# Altium PCB CH32F&V208G-R0.PcbDoc
Units mil, origin at the board's own origin, x right, y up, seen from the top; angles counter-clockwise.
Board outline 2362.2 x 3149.61 mil, 2 copper layers (Top Layer, Bottom Layer); 51 components, 56 nets, 217 pads, 902 vias.
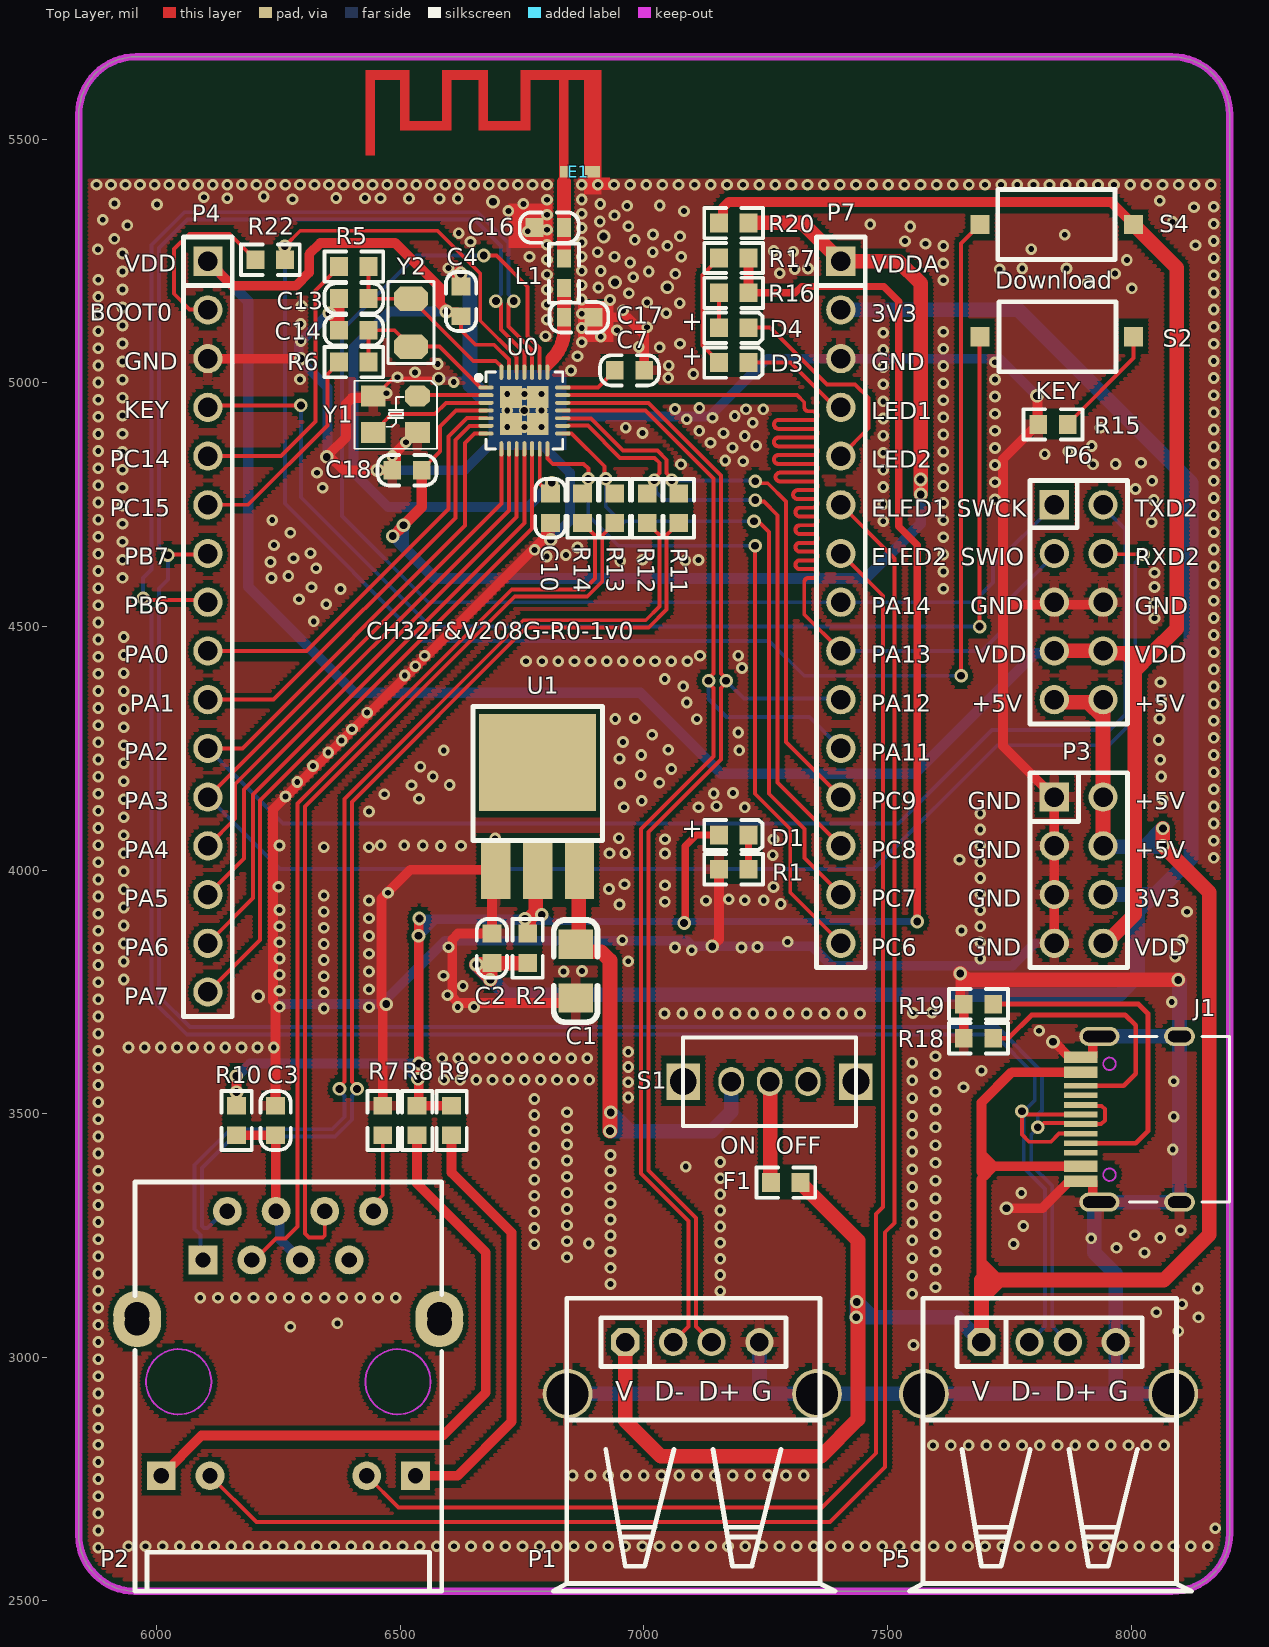
[diagram p0: Top Layer view]
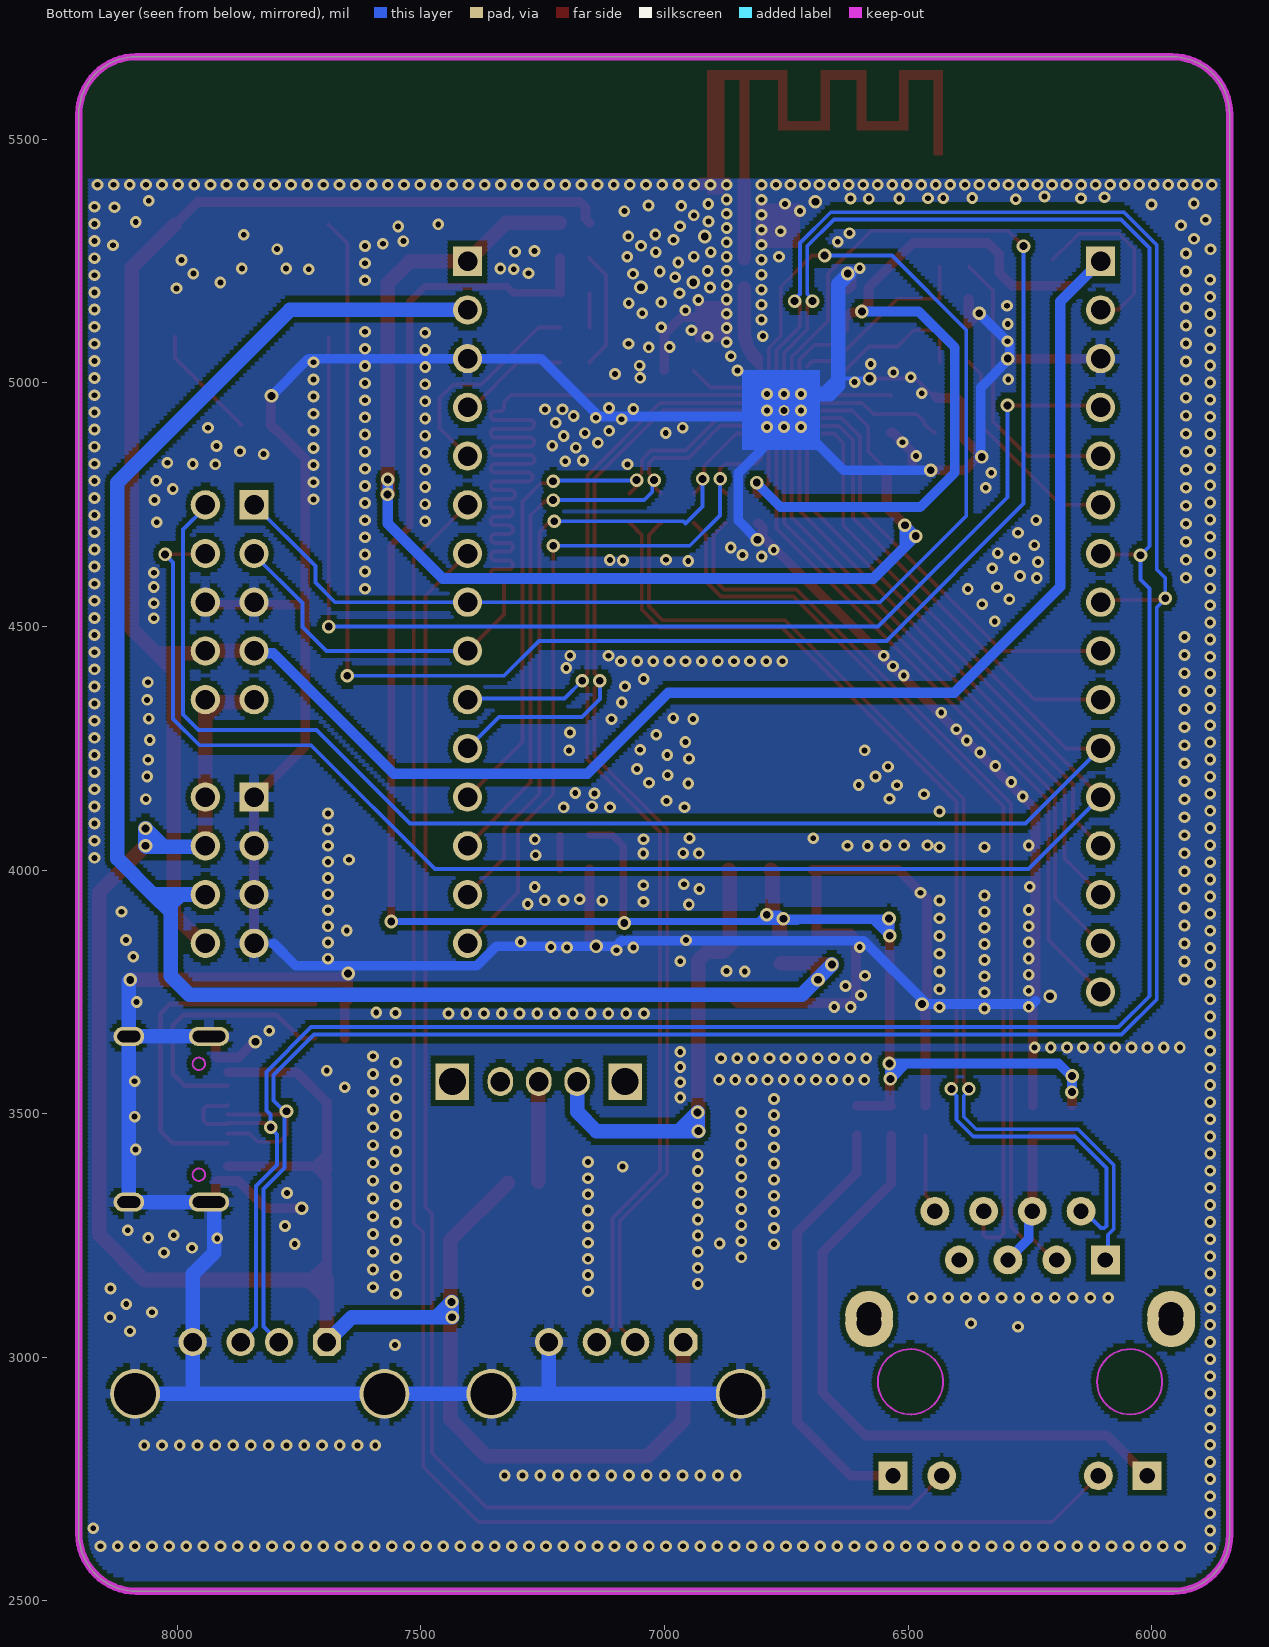
[diagram p1: Bottom Layer view, seen from below]

## Layer stack, top to bottom
Top Solder: solder mask 0.4, Solder Resist, Dk 3.5
Top Layer: signal copper 1.4
Dielectric 1: dielectric 12.6, FR-4, Dk 4.8
Bottom Layer: signal copper 1.4
Bottom Solder: solder mask 0.4, Solder Resist, Dk 3.5

## Board outline
5840,2635.27 ccw(c5955.24,2635.27) 5955.24,2520.03 ccw(c5955.27,2520.03) 5955.27,2520 8084.09,2520 ccw(c8084.09,2638.11) 8202.2,2638.11 8202.2,5551.5 ccw(c8084.09,5551.5) 8084.09,5669.61 5958.11,5669.61 ccw(c5958.11,5551.5) 5840,5551.5

## Design rules (kind name [scope] priority, off if disabled: settings)
Clearance Clearance_2 [InNet('ANT') or InNet('NetC16_2') vs InPolygon] p1: gap=6 ignorepadtopadclearanceinfootprint=FALSE
Clearance Clearance_1 [InPolygon] p2: gap=10 ignorepadtopadclearanceinfootprint=FALSE
Clearance [All] p3: gap=6 ignorepadtopadclearanceinfootprint=FALSE except(8: Arc-Via Track-Via SMDPad-Via THPad-Via Via-Via Via-Fill Via-Poly Via-Region Via-Hole)
ComponentClearance [All] p1 off: gap=10 collisioncheckmode=3 verticalgap=10 showdistances=FALSE
DiffPairsRouting [All] p1: maxlimit=10 minlimit=7 mostfreqgap=8 toplayer_minwidth=6 toplayer_maxwidth=15 toplayer_prefwidth=8 bottomlayer_minwidth=6 bottomlayer_maxwidth=15 bottomlayer_prefwidth=8 maxuncoupledlength=500
MinimumSolderMaskSliver [All] p1 off: minsoldermaskwidth=10
PolygonConnect PolygonConnect_1 [IsVia] p1: connectstyle=Direct reliefconductorwidth=10 reliefentries=4 polygonreliefangle="90 Angle" airgapwidth=10
PolygonConnect [All] p2: connectstyle=Relief reliefconductorwidth=20 reliefentries=4 polygonreliefangle="90 Angle" airgapwidth=10
RoutingVias [All] p1: holewidth=16 width=28 viastyle="Through Hole" minholewidth=12 minwidth=24 maxholewidth=28 maxwidth=50
SilkToSilkClearance [All] p1 off: silktosilkclearance=10
SilkToSolderMaskClearance [IsPad] p1 off: minsilkscreentomaskgap=10 clearancetoexposedcopper=TRUE
SolderMaskExpansion [All] p1: expansion=2 istentingtop=FALSE
Width [All] p1: maxlimit=100 minlimit=6 preferedwidth=10
25 further rules are at their usual default settings.

## Classes and differential pairs
differential pair NewDifferentialPair4: +PA11 -PA12
differential pair NewDifferentialPair3: +PC6 -PC7
differential pair NewDifferentialPair2: +PC8 -PC9
differential pair NewDifferentialPair1: +PB6 -PB7
differential pair ERX: +ERXP -ERXN
differential pair ETX: +ETXP -ETXN

## Components (designator, comment, footprint, x,y, rotation, side; value= is the part's Value field where it differs from the comment)
C1 "10uF" 3216_C 6860.08,3847.87 r90 top
C2 "10uF" 0603_C#1 6687.99,3809.19 r90 top
C3 "1uF" 0603_C#1 6244,3516.63 r270 top
C4 "0.1uF" 0603_C#1 6624.83,5137.13 r90 top
C7 "1uF" 0603_C#1 6940,5026 r0 top
C10 "0.1uF" 0603_C#1 6808,4712.37 r90 top
C13 "12pF" 0603_C#1 6374.37,5173.67 r0 top
C14 "12pF" 0603_C#1 6374.37,5108.33 r0 top
C16 "1.8pF" 0603_C#2 6775.37,5319 r0 top
C17 "1.8pF" 0603_C#2 6896.63,5135 r180 top
C18 "0.1uF" 0603_C#1 6544,4821 r180 top
D1 "power" 0603+ 7153.99,4072.21 r0 top
D3 "RED" 0603+ 7153.99,5041.99 r0 top
D4 "RED" 0603+ 7153.99,5113.52 r0 top
E1 "ANTENNA" ANT-F-1-2.4G-1.6mmFR4 6836.1,5433.52 r0 top
F1 "500mA" 0603#1 7321.52,3358.83 r180 top
J1 "TYPE-C-Receptacle-2.0" TYPE-C-Receptacle-2.0 7896.59,3488.76 r90 top
L1 "1.8nH" 0603#2 6836,5194.97 r90 top
P1 "USB" USBAF 6961.57,3031.42 r0 top
P2 "HR911105A" HR911105A 6095,3200 r0 top
P3 "HEADER 4x2" IDC8-2.54mm 7842.37,4150 r0 top
P4 "HEADER 16" SIP16-2.54mm 6105,5250 r0 top
P5 "USB" USBAF 7692.83,3031.42 r0 top
P6 "LINK" IDC10-2.54mm 7842.37,4350 r0 top
P7 "HEADER 15" SIP15-2.54mm 7404.21,5250 r0 top
R1 "1K" 0603#1 7153.99,4001.86 r0 top
R2 "0Ω" 0603#1 6761.4,3809.19 r90 top
R5 "NC(0R)" 0603#1 6374.37,5239 r0 top
R6 "NC(0R)" 0603#1 6374.37,5043 r0 top
R7 "0Ω" 0603#1 6464,3516.63 r270 top
R8 "1K" 0603#1 6534.3,3516.63 r270 top
R9 "1K" 0603#1 6605.13,3516.63 r270 top
R10 "0Ω" 0603#1 6164,3456 r90 top
R11 "0R(NC)" 0603#1 7071.44,4773 r270 top
R12 "0R(NC)" 0603#1 7007,4773 r270 top
R13 "0R(NC)" 0603#1 6940,4773 r270 top
R14 "0R(NC)" 0603#1 6874,4773 r270 top
R15 "10K" 0603#1 7809.37,4915 r0 top
R16 "1K" 0603#1 7214.62,5185.04 r180 top
R17 "1K" 0603#1 7214.62,5256.57 r180 top
R18 "NC(5.1K)" 0603#1 7717,3655 r180 top
R19 "NC(5.1K)" 0603#1 7717,3725 r180 top
R20 "0Ω" 0603#1 7153.99,5328.09 r0 top
R22 "4.7K" 0603#1 6263.63,5253 r180 top
S1 "SW SPDT" SW1 7258.02,3566.17 r0 top
S2 "KEY" SMD_6.1x3.65x2.5mm-KEY 7690.04,5095 r0 top
S4 "Download" SMD_6.1x3.65x2.5mm-KEY 8005,5325 r180 top
U0 "CH32V208G" QFN28_4x4 6754.61,4943.51 r270 top
U1 "1117-3.3V" SOT-223 6696,4001 r0 top
Y1 "32MHz" XT3225 6535,4973 r180 top
Y2 "32768Hz" FC-135 6522,5173 r270 top

## Footprints (in the part's own frame and the unit in brackets; to place one, negate y for a bottom-side part, rotate by r counter-clockwise, add the part's x,y. Pads: shape width x height; smd on the part's side, far side on the other; paste and mask are expansions set on the pad)
0603#1 [mm]
  rect 0.93x0.98 smd: 1(0,0) 2(1.54,0)
  silkscreen extent -0.76,-0.79 2.3,0.79
0603#2 [mm]
  rect 0.93x0.714 smd: 1(0,0) 2(1.54,0)
  silkscreen extent -0.76,-0.79 2.3,0.79
0603+ [mm]
  rect 0.93x0.98 smd: 1(0,0) 2(1.54,0)
  silkscreen extent -0.76,-0.79 2.27,0.79
0603_C#1 [mm]
  rect 0.93x0.98 smd mask+0.051: 1(0,0) 2(1.54,0)
  silkscreen extent -0.76,-0.79 2.31,0.79
0603_C#2 [mm]
  rect 0.93x0.98 smd mask+0.051: 1(0,0)
  rect 0.714x0.98 smd mask+0.051: 2(1.54,0)
  silkscreen extent -0.76,-0.79 2.31,0.79
3216_C [mil]
  rect 60x70 smd: 1(0,0) 2(-110,0)
  silkscreen extent -160,-45 50,45
ANT-F-1-2.4G-1.6mmFR4 [mm]
  rect 0.8x0.6 smd mask+0: 0(1.483,0)
  rect 0.4x0.6 smd mask+0: 1(0,0)
  Top Layer region: 0.24,5.027 -0.26,5.027 -0.26,-0.304 0.24,-0.304
  Top Layer region: 1.94,5.002 1.04,5.002 1.04,-0.304 1.94,-0.304
  Top Layer region: 1.94,5.296 -2.26,5.296 -2.26,4.796 1.94,4.796
  Top Layer region: -1.76,4.977 -2.26,4.977 -2.26,2.157 -1.76,2.157
  Top Layer region: -1.85,2.651 -4.39,2.651 -4.39,2.156 -1.85,2.156
  Top Layer region: -3.96,4.976 -4.46,4.976 -4.46,2.156 -3.96,2.156
  Top Layer region: -3.96,5.296 -6.36,5.296 -6.36,4.796 -3.96,4.796
  Top Layer region: -5.86,4.977 -6.36,4.977 -6.36,2.157 -5.86,2.157
  Top Layer region: -5.875,2.657 -8.364,2.657 -8.364,2.157 -5.875,2.157
  Top Layer region: -8.06,4.977 -8.56,4.977 -8.56,2.157 -8.06,2.157
  Top Layer region: -8.06,5.296 -10.36,5.296 -10.36,4.796 -8.06,4.796
  Top Layer region: -9.86,4.976 -10.36,4.976 -10.36,0.856 -9.86,0.856
FC-135 [mil]
  oct 50x70 smd: 1(0,0) 2(98.43,0)
  silkscreen extent -35,-47 133,47
HR911105A [mm]
  rect 1.5x1.5 hole 0.8: 1(0,0) 9(-2.175,-11.252) 12(11.075,-11.252)
  round 1.5 hole 0.8: 2(1.27,2.54) 3(2.54,0) 4(3.81,2.54) 5(5.08,0) 6(6.35,2.54) 7(7.62,0) 8(8.89,2.54) 10(0.365,-11.252) 11(8.535,-11.252)
  round 2.5 hole 1.3: ""(-3.43,-2.852) ""(-3.43,-3.3) ""(12.32,-3.3) ""(12.32,-2.852)
  Keep-Out Layer circle w0.1: c-1.265,-6.352 r1.7
  Keep-Out Layer circle w0.1: c10.165,-6.352 r1.7
  silkscreen extent -3.55,-17.27 12.45,4.06
IDC8-2.54mm [mil]
  rect 60x60 hole 40: 1(0,0)
  round 60 hole 40: 2(100,0) 3(0,-100) 4(100,-100) 5(0,-200) 6(100,-200) 7(0,-300) 8(100,-300)
  silkscreen extent -50,-350 150,50
IDC10-2.54mm [mil]
  rect 60x60 hole 40: 1(0,400)
  round 60 hole 40: 2(100,400) 3(0,300) 4(100,300) 5(0,200) 6(100,200) 7(0,100) 8(100,100) 9(0,0) 10(100,0)
  silkscreen extent -50,-50 150,450
QFN28_4x4 [mm]
  rect 1.143x1.143 smd mask+0: 0(-0.699,0.698) 0(-0.698,-0.699) 0(0.698,0.698) 0(0.699,-0.699)
  round 0.559 hole 0.381 mask+0.051: 0(0,0)
  oval 0.2x0.8 smd mask+0.051: 1(-1.2,-2) 2(-0.8,-2) 3(-0.4,-2) 4(0,-2) 5(0.4,-2) 6(0.8,-2) 7(1.2,-2) 15(1.2,2) 16(0.8,2) 17(0.4,2) 18(0,2) 19(-0.4,2) 20(-0.8,2) 21(-1.2,2)
  oval 0.8x0.2 smd mask+0.051: 8(2,-1.2) 9(2,-0.8) 10(2,-0.4) 11(2,0) 12(2,0.4) 13(2,0.8) 14(2,1.2) 22(-2,1.2) 23(-2,0.8) 24(-2,0.4) 25(-2,0) 26(-2,-0.4) 27(-2,-0.8) 28(-2,-1.2)
  silkscreen extent -2,-2.51 2,2
SIP15-2.54mm [mil]
  rect 60x60 hole 40: 1(0,0)
  round 60 hole 40: 2(0,-100) 3(0,-200) 4(0,-300) 5(0,-400) 6(0,-500) 7(0,-600) 8(0,-700) 9(0,-800) 10(0,-900) 11(0,-1000) 12(0,-1100) 13(0,-1200) 14(0,-1300) 15(0,-1400)
  silkscreen extent -50,-1450 50,50
SIP16-2.54mm [mil]
  rect 60x60 hole 40: 1(0,0)
  round 60 hole 40: 2(0,-100) 3(0,-200) 4(0,-300) 5(0,-400) 6(0,-500) 7(0,-600) 8(0,-700) 9(0,-800) 10(0,-900) 11(0,-1000) 12(0,-1100) 13(0,-1200) 14(0,-1300) 15(0,-1400) 16(0,-1500)
  silkscreen extent -50,-1550 50,50
SMD_6.1x3.65x2.5mm-KEY [mm]
  rect 1x1 smd: 1(0,0) 2(8,0)
  silkscreen extent 0.98,-1.83 7.08,1.83
SOT-223 [mil]
  rect 60x120 smd: 1(0,0) 2(86,0) 3(172,0)
  rect 240x200 smd: ""(86,220)
  silkscreen extent -47,60 219,335
SW1 [mm]
  rect 1.75x1.9 hole 1.4: 0(-4.5,0) 0(4.5,0)
  oval 1.321x1.524 hole 1.016: 1(0,0) 2(-2,0) 3(2,0)
  silkscreen extent -4.51,-2.31 4.5,2.29
TYPE-C-Receptacle-2.0 [mm]
  oval 1x1.6 hole 0.6 slot 1.2 at 90 deg: 0(-4.32,-5.15) 0(4.32,-5.15)
  oval 1x2.1 hole 0.6 slot 1.7 at 90 deg: 0(-4.32,-0.97) 0(4.32,-0.97)
  rect 0.6x1.75 smd mask+0.051: A1(-3.225,0) A4(-2.45,0) B1(3.225,0) B4(2.45,0)
  rect 0.3x1.75 smd mask+0.051: A5(-1.25,0) A6(-0.25,0) A7(0.25,0) A8(1.25,0) B5(1.75,0) B6(0.75,0) B7(-0.75,0) B8(-1.75,0)
  Keep-Out Layer circle w0.1: c2.89,-1.5 r0.325
  Keep-Out Layer circle w0.1: c-2.89,-1.5 r0.325
  silkscreen extent -4.32,-7.75 4.32,-2.55
USBAF [mm]
  round 2.6 hole 2.2: 0(-3,-2.7) 0(10,-2.7)
  oct 1.473x1.473 hole 0.965: 1(0,0)
  round 1.473 hole 0.965: 2(2.5,0) 3(4.5,0) 4(7,0)
  silkscreen extent -3.75,-12.99 10.95,2.29
XT3225 [mm]
  oct 1.3x1.1 smd: 1(0,0)
  rect 1.3x1.1 smd: 2(2.3,0) 3(2.3,1.9) 4(0,1.9)
  silkscreen extent -1.02,-0.8 3.27,2.74

## Part data
C1 C2 C3 C4 C7 C10 C13 C14 C16 C17 C18: library part CAP, "Capacitor"
D1 D3 D4: library part LED0, "Typical INFRARED GaAs LED", LatestRevisionDate=08-Jul-2005, LatestRevisionNote="Mech Layer 1 removed.", PackageDescription="LED; 2 Leads", PackageReference=LED-0, Published=8-Jun-2000, Publisher="Altium Limited"
E1: "Generic Antenna"
F1: library part FUSE1, "Fuse"
J1: "Type-C USB2.0 母座"
L1: library part INDUCTOR
P1 P5: "USB Port"
P3: "Header, 4-Pin, Dual row"
P4: "Header, 16-Pin"
P6: library part "Header 5X2H", "Header, 5-Pin, Dual row, Right Angle", LatestRevisionDate=17-Jul-2002, LatestRevisionNote="Re-released for DXP Platform.", Publisher="Altium Limited"
P7: "Header, 15-Pin"
R1 R2 R5 R6 R7 R8 R9 R10 R11 R12 R13 R14 R15 R16 R17 R18 R19: library part RES
R20: library part R
R22: library part Res2, "Resistor"
S2 S4: library part KEY1
U0: "RISC-V BLE5.3 MCU, 10M Ethernet, 2*USB, CAN"
Y1 Y2: library part XTAL, "Crystal Oscillator", LatestRevisionDate=17-Jul-2002, LatestRevisionNote="Re-released for DXP Platform.", PackageDescription="Crystal, Thru-Hole; 2 Leads; Body 3.1 x 8.2 mm (Dia.xH)", PackageReference=R38, Published=8-Jun-2000, Publisher="Altium Limited"

## Via types
v1: diameter 24, hole 12, Top Layer to Bottom Layer, tented both sides, 835 vias
v2: diameter 28, hole 16, Top Layer to Bottom Layer, tented both sides, 67 vias

## Nets (pads, with @x,y where several pads share a name; then routed paths per layer and width w, separated by ;. In a path a pad name is that pad's centre, name@x,y a point inside that pad or via, vN(x,y) a via of type N, cw(c..) or ccw(c..) an arc to the next point about the centre after c; other vN are vias at no path point)
3V3: C2.1 P3.6 P7.2 R2.1 | length 3672
  Top Layer w30: v2(6656.32,3806.38) v2@6656.8,3806.85 ; v2(6684.9,3775.14) v2@6684.9,3778.75 ; R2.1 C2.1 C2.1@6685.65,3806.85 ; v2@6656.8,3806.85 v2@6684.9,3778.75 ; v2@6656.8,3806.85 C2.1@6685.65,3806.85 ; v2@6684.9,3778.75 6684.9,3806.11 C2.1@6685.65,3806.85
  Bottom Layer w30: v2(6656.32,3806.38) 6718.43,3744.26 7975.33,3744.26 8013.05,3781.99 8013.05,3914.17 ; P7.2 7768.54,5150 8122.99,4795.56 8122.99,4024.11 8048.88,3950 ; P3.6 7992.88,3950 ; 7992.88,3950 8012.2,3950 ; 7992.88,3950 8013.05,3929.83 ; 8012.2,3950 8048.88,3950 ; 8012.2,3950 8013.05,3949.15 8013.05,3929.83 ; 8013.05,3914.17 8048.88,3950 ; 8013.05,3914.17 8013.05,3929.83
3V3S: D1.1 R2.2 R8.1 R9.1 R10.2 R16.1 R17.1 U1.2 | length 4292.4
  Top Layer w15: v2(7082.44,3891.55) 7084.72,3893.83 7084.72,4049.7 7107.23,4072.21 D1.1 ; R16.1 7310.19,5185.04 7323.34,5198.19 7492.1,5198.19 7523.09,5167.21 7523.09,4705.42 7560.89,4667.62 v2(7560.89,3894.8)
  Top Layer w20: v2@6163.34,3572.49 6163.67,3572.16 v2(6163.67,3544.56) 6163.67,3516.96 R10.2 ; R8.1 R9.1 ; R8.1@6537.61,3523.24 6537.61,3899.27 v2(6539.14,3900.8) ; R16.1 R17.1
  Top Layer w30: R2.2 6763.86,3872.28 6763.86,3899.16 6778.27,3913.57 6778.27,3997.27 U1.2
  Bottom Layer w15: 6722.54,3899.16 6726.89,3894.8 v2@6768.21,3894.8 ; v2@6763.86,3899.16 v2@6768.21,3894.8 ; v2(6790.27,3908.57) 6793.79,3908.57 6807.57,3894.8 ; v2(7560.89,3894.8) 6807.57,3894.8 ; v2@6768.21,3894.8 6807.57,3894.8
  Bottom Layer w20: v2@6163.34,3572.49 6163.51,3572.33 6163.51,3544.72 v2(6163.67,3544.56) ; v2(6163.34,3577.49) 6165.51,3577.49 6191.19,3603.17 6504,3603.17 ; v2(6537.47,3865.37) v2@6538.3,3866.2 ; 6587.99,3899.16 6571.25,3899.16 ; v2(6755.86,3900.16) 6758.02,3900.16 6764.91,3907.04 6788.74,3907.04 v2(6790.27,3908.57) ; v2@6763.86,3899.16 6722.54,3899.16 6571.25,3899.16 ; 6504,3603.17 v2(6538.37,3603.17) 6537.35,3602.15 6537.35,3572.69 v2(6536.33,3571.66) 6535.51,3571.66 6504,3603.17 ; v2@6538.3,3866.2 6571.25,3899.16 ; v2@6538.3,3866.2 6538.3,3899.96 v2(6539.14,3900.8) 6540.78,3899.16 6571.25,3899.16
+5V: F1.1 J1.A4 J1.B4 P1.1 P3.2 P3.4 P5.1 P6.9 P6.10 | length 4716.4
  Top Layer w20: 7692.83,3158.72 7692.83,3196.23 ; 7730.69,3158.72 7730.34,3158.72 7692.83,3196.23 ; J1.A4 7718.37,3392.31 ; J1.B4 7754.78,3585.22 7692.83,3523.27 7692.83,3417.84 ; 7692.83,3196.23 7692.83,3366.77 7699.74,3373.68 7711.46,3385.4 7718.37,3392.31 ; 7692.83,3417.84 7711.46,3399.22 7718.37,3392.31 ; 7692.83,3417.84 7692.83,3380.59 7704.55,3392.31 7718.37,3392.31
  Top Layer w30: P1.1 6961.57,2870.23 7034.36,2797.45 7364.3,2797.45 7439.4,2872.54 7439.4,3239.98 7321.52,3357.85 F1.1 ; P5.1 7692.83,3121.71 ; 7730.34,3158.72 7729.84,3158.72 ; 7730.69,3158.72 8067.36,3158.72 8160.37,3251.73 8160.37,3954.96 v2(8065.3,4050.03) v2(8065.3,4085.83) ; P6.9 7847.6,4344.76 7911.66,4344.76 ; P3.4 P3.2 7942.37,4314.05 ; 7692.83,3121.71 7692.83,3158.72 7729.84,3158.72 ; 7692.83,3121.71 7729.84,3158.72 ; 7942.37,4314.05 7942.37,4345 7911.42,4345 7942.37,4314.05
  Bottom Layer w30: P5.1 7641.83,3082.42 7468.35,3082.42 ; P3.4@7942.37,4048.42 8027.89,4048.42 ; 7468.35,3082.42 v2(7436.87,3113.89) 7436.87,3083.34 v2(7435.95,3082.42) 7468.35,3082.42 ; 8027.89,4048.42 8063.68,4048.42 v2(8065.3,4050.03) v2(8065.3,4085.83) 8027.89,4048.42
ANT: C17.2 L1.1 U0.22 | length 244.8
  Top Layer w8: 6805.24,5057.29 ccw(c6813.43,5049.1) 6801.85,5049.1 U0.22@6801.85,5024.42 ; 6812.65,5050.5 ccw(c6838.73,5024.42) U0.22@6801.85,5024.42 ; 6820.48,5044.07 6804.1,5027.69 ccw(c6809.54,5022.25) U0.22 U0.22@6801.85,5024.42
  Top Layer w28.1: 6812.65,5050.5 ccw(c6756.29,5106.87) 6836,5106.87 C17.2 L1.1
BOOT0: R22.1 S4.2 U0.26 | length 3689.3
  Top Layer w8: v2(6263,5281) 6294.56,5312.56 6576.48,5312.56 6664.15,5224.89 6664.15,5127.85 6738.8,5053.2 6738.8,5022.31 U0.26 ; v2(7651,4399) 7651,5285.96 S4.2
  Bottom Layer w8: v2(6263,5281) 6263,4752.41 6544.61,4470.8 7257.22,4470.8 7329.02,4399 v2(7651,4399)
CC1: J1.A5 R19.1 | length 714.8
  Top Layer w10: R19.1 8015.24,3725 8034.3,3705.93 8034.3,3464.24 8009.61,3439.55 J1.A5
CC2: J1.B5 R18.1 | length 543.2
  Top Layer w10: R18.1 7747.96,3655 7795.76,3702.8 7988,3702.8 8009.41,3681.39 8009.41,3582.29 7984.78,3557.66 J1.B5
ELED1: P2.10 P7.6 | length 3500.7
  Top Layer w8: P2.10 6204.64,2661.74 7381.64,2661.74 7495.21,2775.32 7495.21,3256.78 7514.54,3276.1 7514.54,4639.68 P7.6
ELED2: P2.11 P7.7 | length 3007.1
  Top Layer w8: P2.11 6495.94,2692.1 7365.55,2692.1 7476.76,2803.31 7476.76,3294.54 7490.85,3308.63 7490.85,4563.36 P7.7
ERXN: P2.6 R13.2 | length 1905.2
  Top Layer w8: P2.6 6345,3250.4 6340.31,3245.71 6312.62,3245.71 6304.13,3254.2 6304.13,4130.65 6734.98,4561.5 6883.71,4561.5 6914.5,4592.29 6914.5,4686.87 6924.71,4697.08 6924.71,4698.06 6939.02,4712.37 R13.2
ERXP: P2.3 R14.2 | length 1917.2
  Top Layer w8: P2.3 6200.9,3200 6245.02,3244.12 6264.23,3244.12 6289.13,3269.02 6289.13,4136.86 6728.77,4576.5 6877.5,4576.5 6899.5,4598.5 6899.5,4687.36 6889.29,4697.57 6889.29,4698.06 6874.98,4712.37 R14.2
ETXN: P2.2 R11.2 | length 2195.2
  Top Layer w8: v2(6411.13,3551.14) 6411.13,3555.33 6400.63,3565.83 6400.63,4140.1 6758.53,4498 7009.93,4498 7046.72,4534.79 7046.72,4634.19 7046.72,4687.65 7056.15,4697.08 7056.15,4698.06 7070.46,4712.37 R11.2
  Bottom Layer w8: P2.2 6138.74,3300 6104.09,3265.35 6097.46,3265.35 6092.78,3270.03 6092.78,3388.79 6157.26,3453.27 6331.56,3453.27 6366.18,3453.27 6400.63,3487.72 6400.63,3536.46 6411.13,3546.96 v2(6411.13,3551.14)
ETXP: P2.1 R12.2 | length 2203.8
  Top Layer w8: v2(6375.13,3551.14) 6375.13,3555.33 6385.63,3565.83 6385.63,4146.31 6752.32,4513 7003.72,4513 7031.72,4541 7031.72,4627.97 7031.72,4687.85 7022.29,4697.28 7022.29,4698.06 7007.98,4712.37 R12.2
  Bottom Layer w8: P2.1 6089.98,3205.02 6089.98,3251.61 6077.78,3263.82 6077.78,3395 6151.05,3468.27 6359.97,3468.27 6385.63,3493.93 6385.63,3536.46 6375.13,3546.96 v2(6375.13,3551.14)
GND: C1.2 C2.2 C3.1 C4.2 C7.2 C10.1 C13.1 C14.1 C16.1 C17.1 C18.2 E1.0 J1.0 J1.A1 J1.B1 P1.0 P1.4 P3.1 P3.3 P3.5 P3.7 P4.3 P5.0 P5.4 P6.5 P6.6 P7.3 R1.1 R7.1 R15.1 R18.2 R19.2 U0.0 U1.1 Y1.2 Y1.4 | length 13214.8
  Top Layer w8: Y1.2 6448.39,4973 6484.39,5009 6530.24,5009 v2(6579,5009)
  Top Layer w20: P4.3 v2@6291.55,5050 ; C3.1 6244,3725.75 6238.5,3731.26 6238.5,3785.69 6238.5,4124.64 6798.71,4684.86 6798.71,4704.06 6807.02,4712.37 C10.1 ; v2(6354.07,5143.12) 6374.37,5122.82 6374.37,5170.92 6375.74,5172.29 C14.1@6375.74,5121.45 ; Y1.2 6440.47,4969.02 6400.57,4969.02 6388.31,4956.75 6388.31,4888.59 6353.92,4854.2 6353.92,4848.37 6356.08,4848.37 6383.45,4821 v2(6453.25,4821) C18.2 6491.68,4829.31 6491.68,4858.81 v1(6511.37,4878.5) 6531.06,4898.2 Y1.4 ; R7.1 6464,3720.29 6461.27,3723.02 6461.27,3941.5 6520.77,4001 U1.1 6687.99,3992.99 C2.2 6618.37,3869.82 6606.65,3858.1 6606.65,3739.26 6618.37,3727.54 6849.74,3727.54 C1.2 ; C17.1 6964.75,5135 7000.63,5099.12 C7.2 ; v2(7140.28,3843.63) 7153.99,3857.34 R1.1 ; v2(7649.37,3787.84) 7649.37,3733.19 7656.96,3725.59 R19.2 R18.2 ; v2(7744.32,3306.29) 7818.45,3306.29 7873.96,3361.8 J1.A1 7919.23,3361.8 7921.04,3359.98 7921.04,3327.63 7929.99,3318.68 J1.0@7934.78,3318.68 ; v2(7806.71,4973.51) 7808.04,4972.18 7808.04,4916.33 R15.1 7809.37,4914.02 7801.06,4905.71 7798.75,4905.71 7737.24,4844.2 7737.24,4831.49 7737.24,4545 ; v2(7839.65,3647.98) 7841.71,3647.98 7873.96,3615.73 J1.B1 7919.23,3615.73 7921.04,3617.54 7921.04,3649.89 7929.99,3658.84 J1.0@7934.78,3658.84 ; P3.7 P3.5 P3.3 7842.37,4130 7842.06,4130.31 7842.06,4150.31 7822.37,4170 7737.24,4255.13 7737.24,4545 ; P6.6@7942.37,4545 7842.37,4545 7737.24,4545
  Top Layer w30: v2@6620.92,5224.84 6620.92,5201.07 6624.23,5197.76 C4.2 ; v2(7649.37,3787.84) 7662.35,3774.86 v2(8096.68,3774.86)
  Bottom Layer w8: v2(6579,5009) 6643.12,5009 6654.12,5009 6685.61,4977.51 v1(6719.61,4943.51)
  Bottom Layer w20: 6238.5,3731.26 6244.57,3725.18 6461.27,3725.18 6591.27,3855.19 7088.32,3855.19 7099.88,3843.63 v2(7140.28,3843.63) 7345.53,3843.63 7385.16,3804 7690.46,3804 7757,3804 7803,3850 ; v2@6353.92,4848.37 6350.72,4851.56 6350.72,4990.83 6293.55,5048 6291.55,5050 6291.55,5080.6 v2(6354.07,5143.12) ; v2(6453.25,4821) 6632.09,4821 6742.54,4931.44 7063.8,4931.44 7134.62,4931.44 7253.18,5050 P7.3 7730.22,5050 v2(7806.71,4973.51) ; v1(6754.61,4909.51) 6848.47,4815.65 6848.47,4717.63 v2(6808.98,4678.14)
  Bottom Layer w30: v2@6620.92,5224.84 6643.12,5202.65 6643.12,5009 6643.12,4995.09 6660.69,4977.51 6685.61,4977.51 v1(6719.61,4977.51) ; P1.0@6843.46,2925.12 7229.86,2925.12 ; P1.4 7237.17,2932.42 7229.86,2925.12 ; J1.0@7934.78,3658.84 J1.0@8099.35,3658.84 ; P5.0@8086.54,2925.12 7961.47,2925.12 ; v2(8096.68,3774.86) 8099.35,3772.19 J1.0@8099.35,3658.84 ; 7229.86,2925.12 7355.28,2925.12 7574.72,2925.12 7961.47,2925.12 ; 7961.47,2925.12 7968.43,2932.07 P5.4 7968.43,3171.08 7924.29,3215.22 7924.29,3314.36 7928.62,3318.68 7934.78,3318.68 8099.35,3318.68 J1.0@8099.35,3658.84
  other v1: 5879.97,2609.54 5941.89,2612.36 5977.05,2612.36 6012.22,2612.36 6047.39,2612.36 6082.56,2612.36 6117.72,2612.36 6152.89,2612.36 6188.06,2612.36 6223.23,2612.36 6258.39,2612.36 6293.56,2612.36 6328.73,2612.36 6363.9,2612.36 6399.06,2612.36 6434.23,2612.36 6469.4,2612.36 6504.57,2612.36 6539.73,2612.36 6574.9,2612.36 6610.07,2612.36 6645.24,2612.36 6680.4,2612.36 6715.57,2612.36 6750.74,2612.36 6785.9,2612.36 6821.07,2612.36 6856.24,2612.36 6891.41,2612.36 6926.57,2612.36 6961.74,2612.36 6996.91,2612.36 7032.08,2612.36 7067.24,2612.36 7102.41,2612.36 7137.58,2612.36 7172.75,2612.36 7207.91,2612.36 7243.08,2612.36 7278.25,2612.36 7313.42,2612.36 7348.58,2612.36 7383.75,2612.36 7418.92,2612.36 7454.09,2612.36 7489.25,2612.36 7524.42,2612.36 7559.59,2612.36 7594.76,2612.36 7629.92,2612.36 7665.09,2612.36 7700.26,2612.36 7735.42,2612.36 7770.59,2612.36 7805.76,2612.36 7840.93,2612.36 7876.09,2612.36 7911.26,2612.36 7946.43,2612.36 7981.6,2612.36 8016.76,2612.36 8051.93,2612.36 8087.1,2612.36 8122.27,2612.36 8157.43,2612.36 5879.97,2644.7 8172.61,2649.23 5879.97,2679.87 5879.97,2715.04 5879.97,2750.21 6853.73,2757.39 6890.21,2757.39 6926.69,2757.39 6963.18,2757.39 6999.66,2757.39 7036.14,2757.39 7072.63,2757.39 7109.11,2757.39 7145.59,2757.39 7182.08,2757.39 7218.56,2757.39 7255.04,2757.39 7291.53,2757.39 7328.01,2757.39 5879.97,2785.37 7593.53,2819.4 7630.01,2819.4 7666.49,2819.4 7702.98,2819.4 7739.46,2819.4 7775.94,2819.4 7812.42,2819.4 7848.91,2819.4 7885.39,2819.4 7921.87,2819.4 7958.36,2819.4 7994.84,2819.4 8031.32,2819.4 8067.81,2819.4 5879.97,2820.54 5879.97,2855.71 5879.97,2890.88 5879.97,2926.04 5879.97,2961.21 5879.97,2996.38 7553.23,3025.26 5879.97,3031.55 8097,3053.87 6274.26,3062.83 5879.97,3066.71 6370.78,3069.86 8138.22,3082.21 8051.91,3092.52 5879.97,3101.88 8104.72,3109.26 6089.27,3122.48 6125.75,3122.48 6162.24,3122.48 6198.72,3122.48 6235.2,3122.48 6271.69,3122.48 6308.17,3122.48 6344.65,3122.48 6381.14,3122.48 6417.62,3122.48 6454.1,3122.48 6490.59,3122.48 7550.93,3130.77 7156.79,3136.01 5879.97,3137.05 8136.93,3141.47 7598.36,3143.84 6931.47,3150.66 7550.93,3167.25 7156.79,3169.12 5879.97,3172.22 7598.36,3180.32 6931.47,3183.77 7156.79,3202.23 7550.93,3203.73 6842.22,3205.28 5879.97,3207.38 8027.44,3215.02 6931.47,3216.88 7598.36,3216.81 7969.82,3224.79 6775.2,3232.45 7758.82,3232.6 6886.81,3233.67 7156.79,3235.34 6842.22,3238.39 7550.93,3240.22 5879.97,3242.55 7918.07,3244.32 8059.67,3245.29 6931.47,3249.99 8007.25,3250.57 7598.36,3253.29 8101.66,3260.92 6775.2,3265.56 7156.79,3268.45 7778.91,3269.6 6842.22,3271.5 7550.93,3276.7 5879.97,3277.72 6931.47,3283.11 7598.36,3289.77 6775.2,3298.67 7156.79,3301.56 6842.22,3304.61 5879.97,3312.89 7550.93,3313.18 6931.47,3316.22 7598.36,3326.26 6775.2,3331.78 7156.79,3334.67 7774.68,3337.25 6842.22,3337.72 5879.97,3348.05 6931.47,3349.33 7550.93,3349.67 7598.36,3362.74 6775.2,3364.89 7156.79,3367.78 6842.22,3370.83 6931.47,3382.44 5879.97,3383.22 7550.93,3386.15 7085.8,3391.57 6775.2,3398 7598.36,3399.22 7156.79,3400.89 6842.22,3403.94 6931.47,3415.55 5879.97,3418.39 7550.93,3422.63 8085.39,3426.74 6775.2,3431.11 7598.36,3435.71 6842.22,3437.05 5879.97,3453.55 7550.93,3459.11 6775.2,3464.22 6842.22,3470.16 7598.36,3472.19 5879.97,3488.72 8087.5,3494.13 7550.93,3495.6 6775.2,3497.33 6842.22,3503.27 7598.36,3508.67 5879.97,3523.89 6775.2,3530.44 7550.93,3532.08 6967.76,3533.61 7598.36,3545.16 7656.12,3554.46 5879.97,3559.06 6967.76,3564.79 8087.5,3566.78 7550.93,3568.56 6589.73,3569.69 6622.84,3569.69 6655.95,3569.69 6689.07,3569.69 6722.18,3569.69 6755.29,3569.69 6788.4,3569.69 6821.51,3569.69 6854.62,3569.69 6887.73,3569.69 7598.36,3581.64 7693.09,3588.53 5879.97,3594.22 6967.76,3595.97 7550.93,3605.05 6585.86,3613.85 6618.98,3613.85 6652.09,3613.85 6685.2,3613.85 6718.31,3613.85 6751.42,3613.85 6784.53,3613.85 6817.64,3613.85 6850.75,3613.85 6883.86,3613.85 7598.36,3618.12 6967.76,3627.15 5879.97,3629.39 5942.16,3636.15 5975.27,3636.15 6008.38,3636.15 6041.49,3636.15 6074.6,3636.15 6107.71,3636.15 6140.82,3636.15 6173.93,3636.15 6207.04,3636.15 6240.15,3636.15 5879.97,3664.56 7811.25,3670.45 5879.97,3699.73 7042.15,3705.65 7078.64,3705.65 7115.12,3705.65 7151.6,3705.65 7188.08,3705.65 7224.57,3705.65 7261.05,3705.65 7297.53,3705.65 7334.02,3705.65 7370.5,3705.65 7406.98,3705.65 7443.47,3705.65 7552.25,3706.77 7591.45,3707.82 6343.09,3716.23 6252.2,3719.47 6435.59,3718.97 6617.82,3719.02 6651.45,3719.02 8083.42,3729.56 5879.97,3734.89 6596.68,3743.52 6343.09,3749.34 6252.2,3752.58 6435.59,3755.46 6628.39,3762.26 5879.97,3770.06 5932.5,3775.62 6343.09,3782.45 6588.51,3783.4 6252.2,3785.69 6435.59,3791.94 6835.15,3792.1 6872.86,3793.16 5879.97,3805.23 5932.5,3812.61 6967.77,3813.11 6343.09,3815.56 7690.46,3818.48 6252.2,3818.8 8090.3,3822.22 6435.59,3828.42 7098.31,3835.64 5879.97,3840.4 7063.84,3841.41 7200.22,3841.41 6599.08,3842.01 7233.18,3842.33 6343.09,3848.67 5932.5,3849.61 6252.2,3851.91 7690.46,3851.59 7294.96,3852.86 6955.72,3856.37 8105.34,3856.6 6435.59,3864.91 5879.97,3875.56 7652.02,3876.21 6343.09,3881.78 6252.2,3885.02 7690.46,3884.7 5932.5,3886.6 6435.59,3901.39 5879.97,3910.73 6343.09,3914.89 8114.65,3914.62 6252.2,3918.13 7690.46,3917.81 5932.5,3923.6 6949.96,3929.61 7280.77,3930.66 7042.96,3935.14 6435.59,3937.87 7127.45,3937.53 7207.09,3938.44 7245.99,3937.98 7174.14,3940.27 5879.97,3945.9 6343.09,3948 7690.46,3950.92 6474.65,3953.77 5932.5,3960.59 6928.39,3961.47 7266.13,3965.45 6250.12,3966.1 7043.36,3969.04 6960.25,3971.27 5879.97,3981.07 7690.46,3984.03 5932.5,3997.58 5879.97,4016.23 7690.46,4017.15 7647.62,4021.47 8169.77,4025.37 7264.52,4030.91 7043.47,4034.21 5932.5,4034.58 6929.37,4034.51 6961.72,4035 6343.09,4047.34 6435.59,4047.32 6582.92,4049.68 6624.45,4050.1 7690.46,4050.26 5879.97,4051.4 6252.2,4050.57 6459.97,4050.93 6508.15,4050.93 6546.37,4050.51 8169.77,4060.54 7043.14,4063.38 7265.97,4063.29 6694.65,4065.47 6948.66,4065.86 5932.5,4071.57 7690.46,4083.37 5879.97,4086.57 8169.77,4095.71 5932.5,4108.57 7690.46,4116.48 6435.59,4120.29 5879.97,4121.74 6958.88,4129.23 7111.94,4129.33 7206.9,4128.97 8169.77,4130.87 7148.9,4131.5 6995.71,4142.23 5932.5,4145.56 8064.52,4145.88 6538.3,4146.75 6264.5,4151.28 6467.2,4155.94 5879.97,4156.9 7143.47,4157.24 7182.97,4158.32 8169.77,4166.04 6522.88,4174.19 6601.18,4174.8 6951.08,4177.76 7031.67,4179.49 6288.36,4180.85 5932.5,4182.56 5879.97,4192.07 6566.82,4192.43 8061.82,4192.41 6993.54,4195.09 8169.77,4201.21 7056.37,4207.66 6541.21,4212.53 6320.78,4213.98 5932.5,4219.55 5879.97,4227.24 8059.8,4226.8 6949.78,4228.89 6994.41,4236.26 8169.77,4236.38 6352.12,4241.4 6589.09,4245.9 7195.69,4245.94 7049.87,4247.09 5932.5,4256.54 5879.97,4262.41 6957.14,4263.13 6379.55,4266.34 8056.43,4267.26 8169.77,4271.54 7016.94,4277.86 7193.78,4282.74 6400.92,4289.13 5932.5,4293.54 5879.97,4297.57 8169.77,4306.71 6941.11,4310.36 7108.77,4310.02 8058.45,4311.09 6981.84,4312.09 6431.91,4323.33 5932.5,4330.53 5879.97,4332.74 8169.77,4341.88 7087.83,4344.27 8061.82,4349.52 5879.97,4367.91 5932.5,4367.53 7080.86,4377.27 8169.77,4377.05 8060.31,4385.74 7042.79,4392.49 6509,4399.74 5879.97,4403.07 5932.5,4404.52 8169.77,4412.21 7201.51,4414.93 6530.85,4418.83 6758.03,4428.85 6791.14,4428.85 6824.25,4428.85 6857.36,4428.85 6890.48,4428.85 6923.59,4428.85 6956.7,4428.85 6989.81,4428.85 7022.92,4428.85 7056.03,4428.85 7089.14,4428.85 5879.97,4438.24 6549.94,4440.07 7114.97,4440.13 7193.62,4440.44 5932.5,4441.52 8169.77,4447.38 5879.97,4473.41 5932.5,4478.51 8169.77,4482.55 5879.97,4508.58 6322.17,4510.69 8048.04,4517.14 8169.77,4517.72 5879.97,4543.74 6347.94,4545.95 8048.04,4547.77 8169.77,4552.88 6292.15,4556.05 6377.32,4577.14 7614.71,4577.73 5879.97,4578.91 6317.65,4580.63 8048.04,4581.41 8169.77,4588.05 5929.59,4600.01 6235.71,4599.75 6270.3,4603.85 8048.04,4610.53 7614.71,4612.89 5879.97,4614.08 6327.21,4619.79 8169.77,4623.22 6233.43,4632.53 6951.22,4634.59 7085.02,4635.53 5929.59,4637.01 6997.02,4637.08 7112.12,4636.54 6280.77,4640.27 6800.51,4643.88 6839.73,4646.99 7614.71,4648.06 5879.97,4649.25 6315.83,4650.74 6775.66,4657.48 8169.77,4658.38 6863.81,4662.52 6240.71,4667.13 5929.59,4674 7614.71,4683.23 5879.97,4684.41 6274.4,4692.62 8169.77,4693.55 5929.59,4711 8042.14,4714.14 7491.22,4716.16 7614.71,4718.4 6237.07,4718.57 5879.97,4719.58 8169.77,4728.72 5929.59,4747.99 7491.22,4751.33 7614.71,4753.56 5879.97,4754.75 8046.77,4759.65 7720.5,4761.15 8169.77,4763.89 8009.06,4782.41 5929.59,4784.98 6340.59,4785.06 7491.22,4786.49 7614.71,4788.73 5879.97,4789.92 7720.5,4796.32 8043.18,4799.16 8169.77,4799.05 6329.19,4815.81 5929.59,4821.98 7491.22,4821.66 7614.71,4823.9 5879.97,4825.08 7720.5,4831.49 7075.95,4832.97 7921.84,4832.98 7968.28,4833.6 8169.77,4834.22 8020.28,4836.42 7203.72,4839.44 7167.09,4841.01 6483.37,4850.29 7822.78,4854.03 7491.22,4856.83 5929.59,4858.97 7614.71,4859.07 5879.97,4860.25 7871.07,4859.6 7181.81,4867.3 7720.5,4866.65 8169.77,4869.39 7230.32,4871.37 7919.37,4870.74 7136.73,4877.32 7206.85,4891.09 7491.22,4891.99 7614.71,4894.23 5879.97,4895.42 5929.59,4895.97 6997.27,4897.4 7163.34,4897.04 7113.57,4901.73 7720.5,4901.82 8169.77,4904.56 6962.67,4908.3 7937.05,4908.14 6719.61,4909.51 6789.61,4909.51 7223.44,4918.32 7087.9,4925.53 7491.22,4927.16 7140.8,4928.66 7614.71,4929.4 5879.97,4930.59 7186.5,4932.1 5929.59,4932.96 7720.5,4936.99 8169.77,4939.72 6789.61,4943.51 7063.8,4946.5 7209.35,4945.87 7245.04,4945.87 7113.88,4948.69 7491.22,4962.33 7614.71,4964.57 5879.97,4965.75 5929.59,4969.96 7720.5,4972.16 8169.77,4974.89 6754.61,4977.51 6789.61,4977.51 6472,4978.86 7491.22,4997.5 7614.71,4999.74 5879.97,5000.92 6609.67,5001.81 5929.59,5006.95 6294.26,5007.37 7720.5,5007.32 8169.77,5010.06 7049.94,5010.59 6494.35,5011.81 7101.57,5018.41 6530.24,5021.81 6850.24,5025.57 7491.22,5032.66 7614.71,5034.9 5879.97,5036.09 7050.98,5035.63 6576.73,5038.88 7720.5,5042.49 5929.59,5043.94 8169.77,5045.23 6863.65,5054.73 7491.22,5067.83 7614.71,5070.07 5879.97,5071.26 7032.21,5073.18 6989.44,5073.7 7073.93,5080.48 8169.77,5080.39 5929.59,5080.94 6872.41,5083.67 6295.85,5085.64 6911.51,5094.8 6798.07,5096.12 7491.22,5103 7614.71,5105.24 5879.97,5106.42 6944.59,5108.12 6872.41,5112.96 7006.65,5114.38 8169.77,5115.56 5929.59,5117.93 6295.53,5121.27 6801.01,5130.04 5879.97,5141.59 6872.41,5142.25 7045.77,5143.07 6957.08,5149.03 8169.77,5150.73 5929.59,5154.93 6297.12,5158.5 6801.01,5160.81 7073.41,5163.93 7006.65,5165.49 6930.35,5170.15 6872.41,5171.55 5879.97,5176.76 6969.14,5184.14 8169.77,5185.9 5929.59,5191.92 6801.01,5191.59 8001.59,5194.29 6906.46,5195.88 6872.41,5200.84 7911.6,5206.09 7614.71,5210.74 5879.97,5211.93 6978.13,5217.01 8169.77,5221.06 6801.01,5222.36 7064.5,5223.95 7278.98,5225.23 7966.93,5224.53 5929.59,5228.92 7009.84,5228.96 6872.41,5230.13 6911.34,5229.89 7730.15,5233.38 7309.45,5233.54 7336.76,5235.13 7776.62,5234.86 7867.35,5234.86 6599.08,5235.7 7614.71,5245.91 6971.7,5247.33 6801.01,5253.13 7991.27,5252.56 8169.77,5256.23 6764.98,5259.19 6872.41,5259.43 6939.7,5259.33 7076.55,5259.06 5929.59,5265.91 6904.95,5268.55 7018.04,5268.63 7306.68,5269.56 7266.71,5270.75 5879.14,5274.24 7795.06,5274.69 7048.18,5281.4 7614.71,5281.08 8132.12,5282.74 6801.01,5283.9 7578.01,5285.67 6872.41,5288.72 6644.2,5290.05 7535.92,5291.24 8169.77,5291.4 6981.35,5293.74 5913.03,5295.88 7074.07,5300.91 7863.66,5304.19 7018.75,5304.81 6620.06,5307.53 6761.49,5311.48 6801.01,5314.68 6872.41,5318.01 7546.7,5321.27 6968.07,5321.74 5939.81,5323.59 7464.44,5325.57 8169.77,5326.57 8085.29,5330.37 6909.56,5331.32 5889.18,5335 6939.7,5344.08 6801.01,5345.45 6872.41,5347.31 6721.82,5353.02 7082.34,5352.76 8128.9,5360.82 8169.77,5361.73 6965.59,5363.59 7032.62,5364.24 6000.42,5366.38 6910.27,5367.49 6752.58,5367.65 5913.43,5368.52 8058.65,5373.97 6801.01,5376.22 6278.85,5376.99 6872.41,5376.6 6580.5,5378.33 6144.91,5379.1 6427.72,5379.47 6459.21,5379.11 6518,5378.69 6618.19,5378.64 6368.23,5379.65 6096.84,5381.24 6219.8,5382.84 5876.39,5407 5906.22,5407 5936.04,5407 5965.87,5407 5995.7,5407 6025.52,5407 6055.35,5407 6085.18,5407 6115,5407 6144.83,5407 6174.65,5407 6204.48,5407 6234.31,5407 6264.13,5407 6293.96,5407 6323.79,5407 6353.61,5407 6383.44,5407 6413.27,5407 6443.09,5407 6472.92,5407 6502.75,5407 6532.57,5407 6562.4,5407 6592.23,5407 6622.05,5407 6651.88,5407 6681.71,5407 6711.53,5407 6741.36,5407 6771.19,5407 6801.01,5407 6872.41,5407 6905.52,5407 6938.63,5407 6971.74,5407 7004.85,5407 7037.96,5407 7071.07,5407 7104.18,5407 7137.29,5407 7170.4,5407 7203.51,5407 7236.62,5407 7269.73,5407 7302.85,5407 7335.96,5407 7369.07,5407 7402.18,5407 7435.29,5407 7468.4,5407 7501.51,5407 7534.62,5407 7567.73,5407 7600.84,5407 7633.95,5407 7667.06,5407 7700.17,5407 7733.28,5407 7766.39,5407 7799.5,5407 7832.61,5407 7865.73,5407 7898.84,5407 7931.95,5407 7965.06,5407 7998.17,5407 8031.28,5407 8064.39,5407 8097.5,5407 8130.61,5407 8163.72,5407
  other v2: 6471.27,3725.18 6208.5,3741.26 6348.92,4848.37 6295.55,5050 7048.18,5196.64 6940.77,5206.48 6623.92,5224.84 6917.36,5300.82 6690.24,5372.15
KEY: P4.4 S2.1 | length 2479.6
  Top Layer w8: P4.4 6108.54,4953.54 6108.58,4953.5 6109.08,4954 v2(6296,4954) ; v2(7689,4500) 7689,5093.96 S2.1
  Bottom Layer w8: v2(6296,4954) 6296,4765.51 6561.51,4500 v2(7689,4500)
LED1: D3.2 P7.4 | length 227.7
  Top Layer w8: D3.2 7301.24,5041.99 7393.23,4950 P7.4
LED2: D4.2 P7.5 | length 449.5
  Top Layer w8: D4.2 7258.95,5113.52 7375.59,4996.88 7433.59,4996.88 7461.54,4968.93 7461.54,4907.32 P7.5
NetC3_2: C3.2 P2.4 P2.5 R10.1 | length 357.1
  Top Layer w20: R10.1 C3.2 6244.5,3455.5 6244.5,3300.5 P2.4
  Bottom Layer w20: P2.4 6252.47,3292.53 6252.47,3242.53 P2.5
NetC16_2: C16.2 E1.1 L1.2 | length 155.2
  Top Layer w28.1: L1.2 C16.2 ; C16.2@6836,5321 6836,5412.79
NetD1_2: D1.2 R1.2 | length 70.3
  Top Layer w15: R1.2 D1.2
NetD3_1: D3.1 R17.2 | length 242.5
  Top Layer w8: D3.1 7153.99,5042.98 7120.28,5076.68 7120.28,5221.87 7128.37,5229.96 7153.99,5255.58 R17.2
NetD4_1: D4.1 R16.2 | length 71.5
  Top Layer w8: D4.1 R16.2
NetF1_2: F1.2 S1.1 | length 208.5
  Top Layer w20: S1.1 S1.1@7259.46,3564.73 ; F1.2@7259.46,3360.27 F1.2
  Top Layer w30: F1.2@7259.46,3360.27 S1.1@7259.46,3564.73
NetP2_8: P2.8 R7.2 | length 163.9
  Top Layer w8: P2.8 6445,3313.82 6464,3332.82 R7.2
NetP2_9: P2.9 R8.2 | length 1323.5
  Top Layer w20: P2.9 6091.89,2839.53 6587.19,2839.53 6675.49,2927.84 6675.49,3215.47 6534.3,3356.66 R8.2
NetP2_12: P2.12 R9.2 | length 882
  Top Layer w20: P2.12 6617.19,2757.01 6728.04,2867.86 6728.04,3256.18 6605.13,3379.09 R9.2
NetP4_2: P4.2 R22.2 | length 378.1
  Top Layer w8: P4.2 6103.85,5151.15 6067.69,5151.15 6035.72,5183.11 6035.72,5275.34 6066.77,5306.39 6149.61,5306.39 6187.71,5268.29 6188.69,5268.29 6203,5253.98 R22.2
NetR15_2: R15.2 S2.2 | length 238.9
  Top Layer w8: R15.2@7868.03,4914.02 7870,4914.02 R15.2 7870,4915.98 8005,5050.98 S2.2
PA0: P4.9 U0.5 | length 855.7
  Top Layer w8: P4.9 6307.37,4450 6599,4741.63 6599,4890 6636.76,4927.76 U0.5
PA1: P4.10 U0.6 | length 897.4
  Top Layer w8: P4.10 6240.1,4350 6613,4722.9 6613,4883 6642.02,4912.02 U0.6
PA2: P4.11 P6.2 U0.7 | length 3422.2
  Top Layer w8: P4.11 6175.92,4250 6633,4707.08 6633,4877 6652.27,4896.27 U0.7
  Bottom Layer w8: P4.11 6258.98,4096.02 7522.48,4096.02 7714.13,4287.68 7956.2,4287.68 7988.41,4319.88 7988.41,4698.96 P6.2@7942.37,4745
PA3: P4.12 P6.4 U0.8 | length 3484.7
  Top Layer w8: P4.12 6707.36,4752.36 U0.8 ; P6.4 7943.9,4648.47 8024.74,4648.47 v2(8025.02,4648.19)
  Bottom Layer w8: P4.12 6252.69,4002.31 7471.41,4002.31 7725.61,4256.51 7954.72,4256.51 8008.59,4310.38 8008.59,4631.76 v2(8025.02,4648.19)
PA4: P4.13 U0.9 | length 1070.8
  Top Layer w8: P4.13 6161.26,4106.25 6161.26,4176.53 6723.11,4738.38 U0.9
PA5: P4.14 U0.10 | length 1177.3
  Top Layer w8: P4.14 6179.04,4024.04 6179.04,4165.5 6738.86,4725.32 U0.10
PA6: P4.15 U0.11 | length 1283.8
  Top Layer w8: P4.15 6198.04,3943.04 6198.04,4155.68 6754.61,4712.25 U0.11
PA7: P4.16 U0.12 | length 1390.4
  Top Layer w8: P4.16 6212.04,3857.04 6212.04,4142.63 6770.35,4700.95 U0.12
PA11: P1.2 P7.11 U0.18 | length 2615.6
  Top Layer w8: U0.18 6845.03,4943.51 6845.41,4943.89 7003.44,4943.89 7143.23,4804.09 7143.23,4403.5 7132.73,4393 v2(7132.73,4388.81) 7132.73,4384.63 7143.23,4374.13 7143.23,4233.36 6994.25,4084.38 6994.25,3377.56 7091.87,3279.94 7091.87,3063.29 P1.2
  Bottom Layer w8: v2(7132.73,4388.81) 7132.73,4351.32 7169.52,4314.53 7339.69,4314.53 P7.11
PA12: P1.3 P7.10 U0.19 | length 2541.1
  Top Layer w8: U0.19 6845.03,4959.26 6845.41,4958.89 7009.65,4958.89 7158.23,4810.3 7158.23,4403.5 7168.73,4393 v2(7168.73,4388.81) 7168.73,4384.63 7158.23,4374.13 7158.23,4227.14 7009.25,4078.17 7009.25,3383.77 7106.87,3286.15 7106.87,3063.29 P1.3
  Bottom Layer w8: v2(7168.73,4388.81) 7205.16,4352.39 7401.82,4352.39 P7.10
PA13: P6.3 P7.9 U0.20 | length 2667.9
  Top Layer w8: U0.20 7314.53,4975.01 7329.1,4960.45 7329.1,4954.97 7329.1,4950.97 ccw(c7338.1,4950.97) 7338.1,4941.97 7347.52,4941.97 cw(c7347.52,4932.97) 7347.52,4923.97 7276.01,4923.97 ccw(c7276.01,4914.97) 7276.01,4905.97 7347.52,4905.97 cw(c7347.52,4896.97) 7347.52,4887.97 7276.01,4887.97 ccw(c7276.01,4878.97) 7276.01,4869.97 7347.52,4869.97 cw(c7347.52,4860.97) 7347.52,4851.97 7276.01,4851.97 ccw(c7276.01,4842.97) 7276.01,4833.97 7347.52,4833.97 cw(c7347.52,4824.97) 7347.52,4815.97 7279.35,4815.97 ccw(c7279.35,4806.97) 7279.35,4797.97 7347.52,4797.97 cw(c7347.52,4788.97) 7347.52,4779.97 7315.35,4779.97 ccw(c7315.35,4770.97) 7315.35,4761.97 7347.52,4761.97 cw(c7347.52,4752.97) 7347.52,4743.97 7320.11,4743.97 ccw(c7320.11,4734.97) 7320.11,4725.97 7347.52,4725.97 cw(c7347.52,4716.97) 7347.52,4707.97 7320.11,4707.97 ccw(c7320.11,4698.97) 7320.11,4689.97 7347.52,4689.97 cw(c7347.52,4680.97) 7347.52,4671.97 7320.11,4671.97 ccw(c7320.11,4662.97) 7320.11,4653.97 7347.52,4653.97 cw(c7347.52,4644.97) 7347.52,4635.97 7320.11,4635.97 ccw(c7320.11,4626.97) 7320.11,4617.97 7347.52,4617.97 cw(c7347.52,4608.97) 7347.52,4599.97 7338.1,4599.97 ccw(c7338.1,4590.97) 7329.1,4590.97 7329.1,4561.82 7329.1,4525.12 P7.9
  Bottom Layer w8: P7.9 7693.8,4450 7743.19,4499.4 7743.19,4548.32 7842.37,4647.5 P6.3
PA14: P6.1 P7.8 U0.23 | length 2676.3
  Top Layer w8: v2(6671.33,5261.75) 6697.21,5261.75 6761.33,5197.63 6761.33,5096.72 6786.04,5072 6786.04,5022.31 U0.23
  Bottom Layer w8: v2(6671.33,5261.75) 6533.23,5261.75 6380.49,5109 6380.49,4726.95 6557.44,4550 P7.8 7676.36,4550 7716.56,4590.2 7716.56,4624.19 P6.1
PB6: J1.A7 J1.B7 P4.8 P5.2 U0.24 | length 5530.5
  Top Layer w8: v2(5972.05,4558.22) 5975.87,4554.39 6100.61,4554.39 P4.8 ; v2@6722,5163.31 6722,5115.96 6769.98,5067.98 6769.98,5034.31 6770.35,5033.94 U0.24 ; J1.B7 7852.33,3459.24 7835.72,3442.62 7790.55,3442.62 7775.78,3457.39 7775.78,3495.77 7778.62,3498.61 J1.A7
  Bottom Layer w8: v2(6732.86,5168.04) 6732.86,5171.87 6722,5182.72 6722,5287.14 6658.65,5350.49 6056.76,5350.49 5989.49,5283.22 5989.49,4617.18 5972.05,4599.73 5972.05,4556.34 5989.49,4538.9 5989.49,3734.94 6061.71,3662.73 7719.27,3662.73 7802.16,3579.85 7802.16,3527.56 7779.61,3505.01 7779.61,3389.13 7793.41,3375.33 7821.25,3347.49 7823.13,3345.61 7823.13,3063.29 P5.2
  other v2: 7775.78,3505.01
PB7: J1.A6 J1.B6 P4.7 P5.3 U0.25 | length 5355.5
  Top Layer w8: v2(6022.98,4646.5) 6024.73,4648.25 6103.25,4648.25 P4.7 ; v2@6707,5163.31 6707,5109.75 6754.98,5061.77 6754.98,5034.31 6754.61,5033.94 U0.25 ; v2(7808.18,3472.26) 7812.57,3472.26 7821.13,3480.83 7894.69,3480.83 J1.A6 7938.61,3478.92 7946.19,3486.5 7946.19,3509.47 7939.27,3516.39 7898.5,3516.39 J1.B6
  Bottom Layer w8: v2(6696.14,5168.04) 6696.14,5171.87 6707,5182.72 6707,5280.92 6652.43,5335.49 6062.97,5335.49 6004.49,5277.01 6004.49,4664.98 v2(6022.98,4646.5) 6022.98,4596.66 6004.49,4578.17 6004.49,3741.16 6067.92,3677.73 7725.49,3677.73 7817.16,3586.06 7817.16,3507.1 7808.31,3498.26 7808.31,3472.4 v2(7808.18,3472.26) ; v2@7807.16,3472.26 7807.16,3469.67 7795.06,3457.57 7795.06,3394.89 7836.25,3353.7 7838.13,3351.82 7838.13,3063.29 P5.3
PC6: P7.15 R14.1 U0.14 | length 1500.7
  Top Layer w8: U0.14 6801.91,4864.71 6801.91,4844.89 6812.9,4833.9 6876.37,4833.9 6885.91,4824.37 6885.91,4803.36 v2(6885.67,4803.12) 6885.67,4784.67 R14.1 ; v2(7228.19,4665.83) 7228.19,4156.92 7300.41,4084.7 7300.41,3953.8 P7.15
  Bottom Layer w8: v2(6885.67,4803.12) 6885.67,4728.23 6948.06,4665.83 v2(7228.19,4665.83)
PC7: P7.14 R13.1 U0.15 | length 1401
  Top Layer w8: U0.15 6851.73,4896.27 6918.88,4829.12 6918.88,4805.9 v2(6921.67,4803.12) 6924.71,4800.08 6924.71,4787.31 6939.02,4773 R13.1 ; v2(7226.08,4716.25) 7229.91,4712.42 7238.53,4712.42 7256.74,4694.2 7256.74,4156.97 7329.26,4084.45 7329.26,4024.95 P7.14
  Bottom Layer w8: v2(6921.67,4803.12) 6921.67,4746.7 6956.61,4711.76 6961.09,4716.25 v2(7226.08,4716.25)
PC8: P7.13 R12.1 U0.16 | length 1331.1
  Top Layer w8: U0.16 6845.03,4912.02 6845.41,4912.39 6884.95,4912.39 6950.97,4846.37 7021.55,4846.37 7031.72,4836.2 7031.72,4815.35 7021.22,4804.85 v2(7021.22,4800.66) 7021.22,4787.22 R12.1 ; v2(7228.52,4759.56) 7231.39,4756.69 7246.42,4756.69 7274.58,4728.52 7274.58,4179.63 P7.13
  Bottom Layer w8: v2(7021.22,4800.66) 7025.05,4796.84 7025.05,4776.43 7042.09,4759.39 7042.25,4759.56 v2(7228.52,4759.56)
PC9: P7.12 R11.1 U0.17 | length 1246.6
  Top Layer w8: U0.17 6845.03,4927.76 6845.41,4927.39 6891.16,4927.39 6957.18,4861.37 7027.76,4861.37 7046.72,4842.41 7046.72,4815.35 7057.22,4804.85 v2(7057.22,4800.66) 7057.22,4787.22 R11.1 ; v2(7228.52,4798.13) 7232.34,4794.3 7254.22,4794.3 7291.4,4757.12 7291.4,4262.81 P7.12
  Bottom Layer w8: v2(7057.22,4800.66) 7058.16,4799.73 7234.59,4799.73 7232.99,4798.13 v2(7228.52,4798.13)
PC14: P4.5 R5.1 | length 588.3
  Top Layer w8: P4.5 6254.8,4850 6325.88,4921.07 6325.88,5189.52 6337.56,5201.21 6374.37,5238.02 R5.1
PC15: P4.6 R6.1 | length 452.7
  Top Layer w8: P4.6 6187.17,4750 6350.21,4913.04 6350.21,5017.86 6374.37,5042.02 R6.1
V5V: C1.1 S1.2 U1.3 | length 1036.7
  Top Layer w30: U1.3 6866.04,3999.04 6866.04,3849.84 6864.08,3847.87 6879.08,3832.87 6912.27,3832.87 6930.3,3814.84 v2(6930.3,3464.41)
  Bottom Layer w30: 7001.04,3464.41 6970.52,3464.41 ; S1.2 7179.28,3504.19 7139.5,3464.41 6970.52,3464.41 ; 6970.52,3464.41 v2(6932,3502.93) 6932,3466.11 v2(6930.3,3464.41) 6970.52,3464.41
VDD: C4.1 C10.2 P3.8 P4.1 P6.7 P6.8 R20.1 S4.1 U0.13 U0.27 | length 7255.8
  Top Layer w8: C4.1 6624.83,5108.3 6654.57,5078.56 6692.39,5078.56 6723.11,5047.84 U0.27 ; U0.13 6786.1,4793.91 6807.02,4773 C10.2
  Top Layer w20: P4.1 6155.52,5199.48 6285.98,5199.48 6312.97,5226.47 6312.97,5264.46 6335.85,5287.35 6489.65,5287.35 6581.36,5195.64 6581.36,5162.28 6594.86,5148.78 v2@6594.86,5146.91 ; v2@6596.33,5145.44 6616.52,5145.44 C4.1 ; C10.2 6809.35,4774.35 6809.35,4793.13 v2@6810.7,4794.48 ; R20.1@7154,5329.09 7162.3,5337.38 7162.3,5359.76 7174.01,5371.47 7958.53,5371.47 S4.1
  Top Layer w30: P6.7 7842.68,4450.31 7942.06,4450.31 P6.8 ; P3.8 7947.79,3850 8007.51,3909.73 8007.51,4409.81 ; P6.8@7942.37,4445 7989.94,4445 ; S4.1 8093.61,5236.39 8093.61,4495.91 8042.71,4445 ; 7989.94,4445 8007.51,4427.43 8007.51,4409.81 ; 7989.94,4445 8042.71,4445 ; 8007.51,4409.81 8042.71,4445
  Bottom Layer w20: v2(6594.71,5146.76) 6478.04,5146.76 6404.05,5072.77 6404.05,4816.47 6474.89,4745.63 6761.85,4745.63 v2@6810.7,4794.48
  Bottom Layer w22: P4.1 6187.72,5167.28 6187.72,4581.84 6405.44,4364.12 6992.27,4364.12 7158.55,4197.85 7555.85,4197.85 7803,4445 P6.7@7842.37,4445
  other v2: 6810.7,4795.48
VDDA: C18.1 P7.1 R20.2 U0.4 | length 2544
  Top Layer w8: C18.1 6544,4821.98 6581.81,4859.79 6581.81,4910.81 6614.51,4943.51 U0.4
  Top Layer w22: v2(6484.44,4685.69) v2@6506.47,4707.72 ; C18.1 6544,4745.25 v2(6506.59,4707.84) ; v2@6506.47,4707.72 6506.59,4707.72 v2(6506.59,4707.84) ; v2@6506.47,4707.72 v2(6506.59,4707.84)
  Top Layer w30: R20.2@7214.62,5329.09 7325.12,5329.09 P7.1 7522.25,5250 7568,5204.25 v2(7568,4802) 7568,4771.42 v2(7568.43,4771.42)
  Bottom Layer w22: v2(7568,4802) 7568,4711.56 7455.23,4598.79 6571.34,4598.79 6506.59,4663.53 ; 6506.59,4663.53 v2(6506.59,4707.84) v2(6484.44,4685.69) 6506.59,4663.53
VINTA: C7.1 U0.21 | length 121.8
  Top Layer w8: U0.21 6905.74,4990.76 6940,5025.02 C7.1
X32IN: C13.2 R5.2 U0.28 Y2.1 | length 395.5
  Top Layer w8: R5.2 C13.2 6435.67,5173 Y2.1 6649.65,5045.35 6695.95,5045.35 U0.28@6707.3,5034
X32OUT: C14.2 R6.2 U0.1 Y2.2 | length 354.9
  Top Layer w8: R6.2 6435,5107.35 C14.2 6488.24,5108.33 Y2.2 6580.36,5074.57 6664.18,4990.76 U0.1
XIN: U0.2 Y1.1 | length 141.7
  Top Layer w8: Y1.1 6537.01,4975.01 U0.2
XOUT: U0.3 Y1.3 | length 259
  Top Layer w8: Y1.3 6448.39,4898.2 6466.04,4915.85 6466.04,4919.79 6482.25,4936 6570.74,4936 6594,4959.26 U0.3
pads on no net: J1.A8 J1.B8 P2. P2.7 S1.0 S1.3 U1.

## Polygon pours and split planes (outlines as drawn)
GND on Top Layer "GND" (hatched Horizontal grid 8 track 8, remove dead copper, pour order 1): 5840,5669.61 8202.38,5669.61 8202.38,2520 5840,2520
GND on Bottom Layer "GND" (hatched Horizontal grid 8 track 8, remove dead copper, pour order 0): 5840,5669.61 8202.2,5669.61 8202.2,2520 5840,2520 5840,2635.27

## Keep-outs
Keep-Out Layer:
  the board outline again, w15

## Other copper
Top Layer:
  rectangle net GND: 6721.88,5276.88 6811.99,5368.57
  rectangle net GND: 6864.32,5083.89 6937.37,5168.29
  rectangle net GND: 6877.03,5387.34 6912.47,5433.52
  rectangle net GND: 6864.73,5395.71 6930.08,5421.55
  pour cut-out: 6811.99,5276.88 6860.12,5276.88 6860.12,5177.6 6811.99,5177.6
Bottom Layer:
  rectangle net GND: 6681.05,4862.19 6840.68,5026.78
Multi-Layer:
  pour cut-out: 8202.37,5417.55 5840,5417.55 5840,5669.61 8202.38,5669.61

## Silkscreen, mask and mechanical layers (free items; w line width, h text height)
Top Overlay:
  text "VDD" at 5932.99,5228.26 h35
  text "VDDA" at 7466.4,5226.15 h35
  text "BOOT0" at 5863.01,5127.97 h35
  text "3V3" at 7466.4,5126.04 h35
  text "GND" at 5932.99,5027.67 h35
  text "GND" at 7466.4,5025.94 h35
  text "KEY" at 5932.99,4927.38 h35
  text "LED1" at 7466.4,4925.83 h35
  text "PC14" at 5903.83,4827.09 h35
  text "LED2" at 7466.4,4825.73 h35
  text "PC15" at 5903.83,4726.8 h35
  text "ELED1" at 7466.4,4725.63 h35
  text "SWCK" at 7641.9,4725.63 h35
  text "TXD2" at 8007.13,4725.63 h35
  text "PB7" at 5932.99,4626.5 h35
  text "ELED2" at 7466.4,4625.52 h35
  text "SWIO" at 7650.43,4625.52 h35
  text "RXD2" at 8007.13,4625.52 h35
  text "PB6" at 5932.99,4526.21 h35
  text "PA14" at 7466.4,4525.42 h35
  text "GND" at 7669.78,4525.42 h35
  text "GND" at 8007.13,4525.42 h35
  text "CH32F&V208G-R0-1v0" at 6430.44,4473.89 h35
  text "PA0" at 5932.99,4425.92 h35
  text "PA13" at 7466.4,4425.31 h35
  text "VDD" at 7678.57,4425.31 h35
  text "VDD" at 8007.13,4425.31 h35
  text "PA1" at 5944.65,4325.63 h35
  text "PA12" at 7466.4,4325.21 h35
  text "+5V" at 7673.3,4325.21 h35
  text "+5V" at 8007.13,4325.21 h35
  text "PA2" at 5932.99,4225.33 h35
  text "PA11" at 7466.4,4225.11 h35
  text "PA3" at 5932.99,4125.04 h35
  text "PC9" at 7466.4,4125 h35
  text "GND" at 7664.74,4125 h35
  text "+5V" at 8007.13,4125 h35
  text "PA4" at 5932.99,4024.75 h35
  text "PC8" at 7466.4,4024.9 h35
  text "GND" at 7664.74,4024.9 h35
  text "+5V" at 8007.13,4024.9 h35
  text "PC7" at 7466.4,3924.79 h35
  text "GND" at 7664.74,3924.79 h35
  text "3V3" at 8007.13,3924.79 h35
  text "PA5" at 5932.99,3924.46 h35
  text "PC6" at 7466.4,3824.69 h35
  text "GND" at 7664.74,3824.69 h35
  text "VDD" at 8007.13,3824.69 h35
  text "PA6" at 5932.99,3824.16 h35
  text "PA7" at 5932.99,3723.87 h35
  text "ON" at 7157,3417.75 h35
  text "OFF" at 7270.55,3417.75 h35
Mechanical 1:
  lines w15: 5840,2638.11 ccw(c5958.11,2638.11) 5958.11,2520 8084.09,2520 ccw(c8084.09,2638.11) 8202.2,2638.11 8202.2,5551.5 ccw(c8084.09,5551.5) 8084.09,5669.61 5958.11,5669.61 ccw(c5958.11,5551.5) 5840,5551.5 5840,2638.11

## Text inside footprints (layer, text, board x,y; h text height)
D1: Top Overlay "+" at 7115.91,4061.22 h40 r90
D3: Top Overlay "+" at 7115.91,5031 h40 r90
D4: Top Overlay "+" at 7115.91,5102.53 h40 r90
P1: Top Overlay "D-" at 7021.57,2911.42 h40; Top Overlay "D+" at 7111.57,2911.42 h40; Top Overlay "V" at 6941.57,2911.42 h40; Top Overlay "G" at 7221.57,2911.42 h40
P5: Top Overlay "D-" at 7752.83,2911.42 h40; Top Overlay "D+" at 7842.83,2911.42 h40; Top Overlay "V" at 7672.83,2911.42 h40; Top Overlay "G" at 7952.83,2911.42 h40